# Altium PCB powerSupply2.PcbDoc
Units mm, origin at the board's own origin, x right, y up, seen from the top; angles counter-clockwise.
Board outline 50 x 50 mm, 4 copper layers (Top Layer, Layer 1, Layer 2, Bottom Layer), stack 1.586 mm thick; 33 components, 25 nets, 85 pads, 0 vias.
Unrouted connection lines stored in the file: 58.
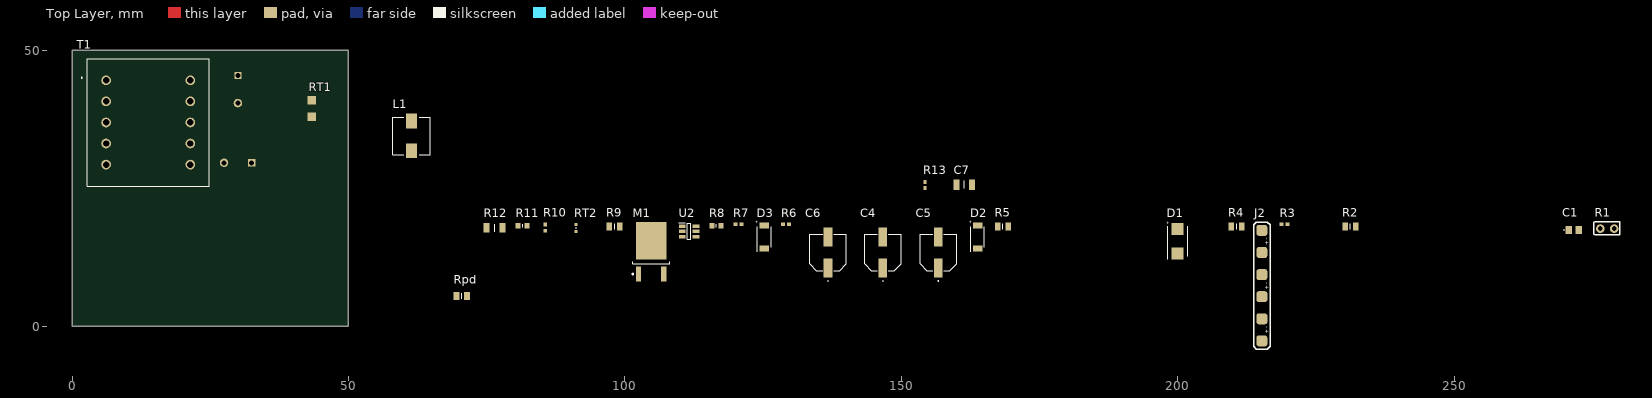
[diagram p0: Top Layer view]
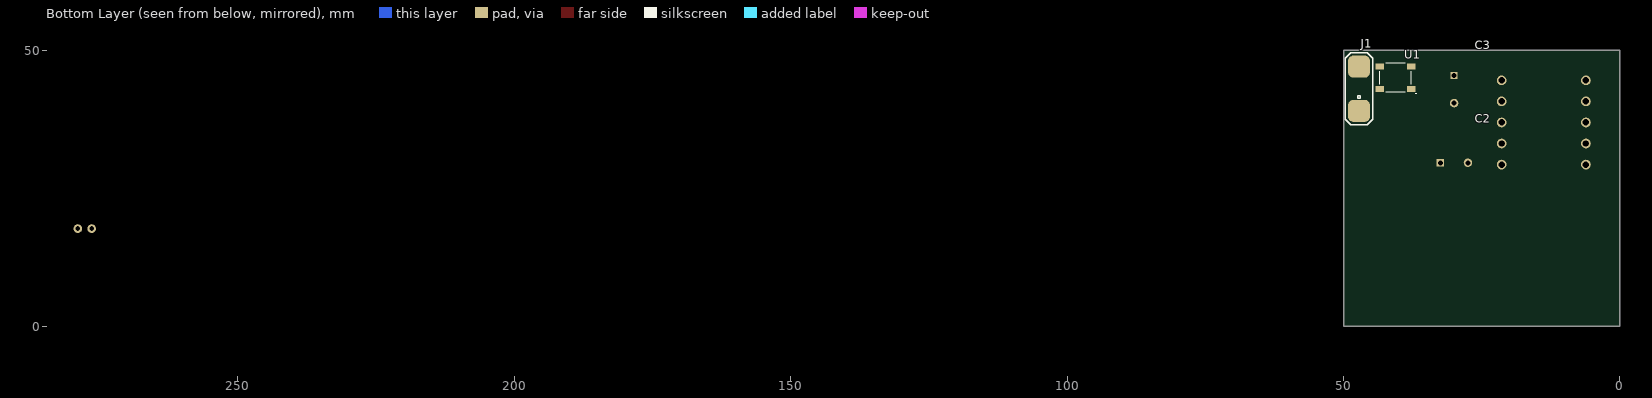
[diagram p1: Bottom Layer view, seen from below]

## Layer stack, top to bottom
Top Solder: solder mask 0.0203, Solder Resist, Dk 3.8
Top Layer: signal copper 0.035
Prepreg2: prepreg 0.2104, PP-006, Dk 4.6
Layer 1: signal copper 0.0152
Core: dielectric 1.065, FR-4, Dk 4.6
Layer 2: signal copper 0.0152
Prepreg1: prepreg 0.2104, PP-006, Dk 4.6
Bottom Layer: signal copper 0.035
Bottom Solder: solder mask 0.0203, Solder Resist, Dk 3.8

## Board outline
0,0 50,0 50,50 0,50

## Design rules (kind name [scope] priority, off if disabled: settings)
Clearance [All] p1: gap=0.3 ignorepadtopadclearanceinfootprint=FALSE
PolygonConnect [All] p1: connectstyle=Relief reliefconductorwidth=0.254 reliefentries=4 polygonreliefangle="90 Angle" airgapwidth=0.254
RoutingVias [All] p1: holewidth=0.3 width=0.6 viastyle="Through Hole" minholewidth=0.3 minwidth=0.6 maxholewidth=0.3 maxwidth=0.6
SilkToSolderMaskClearance [IsPad] p1: minsilkscreentomaskgap=0.1 clearancetoexposedcopper=TRUE
SolderMaskExpansion [All] p1: expansion=0.102 istentingtop=FALSE
Width [All] p1: maxlimit=1 minlimit=0.2 preferedwidth=0.5
29 further rules are at their usual default settings.

## Components (designator, comment, footprint, x,y, rotation, side; value= is the part's Value field where it differs from the comment)
C1 "0805C" 0805C 271.631,17.446 r0 top
C2 "10uF" 10uF 32.5,29.6 r180 bottom
C3 "10uF" 10uF 30,45.4 r270 bottom
C4 "16SVPG270MX" Cout 146.663,13.382 r0 top
C5 "16SVPG270MX" Cout 156.696,13.382 r0 top
C6 "16SVPG270MX" Cout 136.757,13.382 r0 top
C7 "1uF" 1206C 161.417,25.654 r0 top
D1 "UFS180Je3_TR13" UFS180Je3_TR13 200.003,15.414 r90 top
D2 "RB058LAM100TR" Shottky_Diode 163.808,16.176 r90 top
D3 "RB058LAM100TR" Shottky_Diode 125.2,16.176 r90 top
J1 "AC(IN)" AC(IN) 47.2,39 r90 bottom
J2 "12V" OUT(12V) 215.243,-2.62 r90 top
L1 "470uF" Inductor 61.4,31.8 r90 top
M1 "MOSFET" MOSFET 104.753,13.509 r90 top
R1 "3W-Resistor" 3W-Resistor 276.457,17.7 r0 top
R2 "4k99R" 0805R 231.245,18.081 r0 top
R3 "R" 0402R 218.799,18.462 r0 top
R4 "4k99R" 0805R 210.671,18.081 r0 top
R5 "4k99R" 0805R 168.38,18.081 r0 top
R6 "117R" 0402R 128.629,18.462 r0 top
R7 "22.1R" 0402R 119.993,18.462 r0 top
R8 "52k5R" 0603R 116.564,18.208 r0 top
R9 "10R" 0805R 98.149,18.081 r0 top
R10 "1k4R" 0402R 85.576,17.319 r90 top
R11 "19k3R" 0603R 81.512,18.208 r0 top
R12 "1.05R" 1206R 76.432,17.827 r0 top
R13 "6k19R" 0402R 154.305,25.019 r90 top
Rpd "10kR" 0805R 70.5,5.5 r0 top
RT1 "Cl-60" CL-60 43.4,37.9 r90 top
RT2 "NTCG104BF683JT1X" NTC 91.164,17.827 r90 top
T1 "750312495" 750312495 6.16,44.52 r0 top
U1 "CD-MBL206SL" CD-MBL210S_1 40.6,45 r270 bottom
U2 "UCC28701DBVT" SOT95P280X145-6N 111.611,17.192 r0 top

## Footprints (in the part's own frame and the unit in brackets; to place one, negate y for a bottom-side part, rotate by r counter-clockwise, add the part's x,y. Pads: shape width x height; smd on the part's side, far side on the other; paste and mask are expansions set on the pad)
3W-Resistor [mm]
  round 1.575 hole 0.85: 1(0,0) 2(2.5,0)
  silkscreen extent -1.14,-1.14 3.56,1.27, body extent -1.07,-1.15 2.79,1.15, height 8.18
10uF [mm]
  rect 1.3x1.3 hole 0.9: 1(0,0)
  round 1.524 hole 0.9: 2(5,0)
  body extent -4,-6.5 9,6.5, height 27
0402R [mm]
  rect 0.7x0.6 smd: 1(0,0) 2(1.1,0)
  body extent 0.05,-0.25 1.05,0.25, height 0.35
0603R [mm]
  rect 0.9x0.95 smd: 1(-0.8,0) 2(0.8,0)
  silkscreen extent 0,-0.3 0,0.3, body extent -0.8,-0.4 0.8,0.4, height 0.55
0805C [mm]
  rect 1.15x1.45 smd: 1(-0.9,0) 2(0.9,0)
  silkscreen extent -1.8,-0.05 -1.7,0.05, body extent -1.1,-0.76 1.1,0.69, height 0.89
0805R [mm]
  rect 1x1.4 smd: 1(-0.95,0) 2(0.95,0)
  silkscreen extent 0,-0.53 0,0.53, body extent -1,-0.63 1,0.63, height 0.5
1206C [mm]
  rect 1.1x1.92 smd: 1(-1.41,0) 2(1.41,0)
  silkscreen extent 0,-0.7 0,0.7, body extent -1.6,-0.8 1.6,0.8, height 2.29
1206R [mm]
  rect 1.05x1.75 smd: 1(-1.45,0) 2(1.45,0)
  silkscreen extent 0,-0.7 0,0.7, body extent -1.55,-0.8 1.55,0.8, height 0.75
750312495 [mm]
  round 1.755 hole 1.17: 1(0,0) 2(0,-3.81) 3(0,-7.62) 4(0,-11.43) 5(0,-15.24) 6(15.24,-15.24) 7(15.24,-11.43) 8(15.24,-7.62) 9(15.24,-3.81) 10(15.24,0)
  silkscreen extent -4.48,-19.12 18.62,3.88, body extent -3.38,-19.12 18.62,3.88, height 17.63
AC(IN) [mm]
  rrect50% 4x4 smd: 1(0,0) 2(8,0)
  silkscreen extent -2.5,-2.5 10.5,2.5
CD-MBL210S_1 [mm]
  rect 1.1x1.5 smd: 1(2.05,2.86) 2(2.05,-2.86) 3(-2.05,-2.86) 4(-2.05,2.86)
  silkscreen extent -2.6,-2.85 2.91,3.78, body extent -2.59,-2.92 2.71,2.92, height 1.23
CL-60 [mil]
  rect 60x60 smd: 1(0,0) 2(118.11,0)
Cout [mm]
  rect 1.6x3.5 smd: 1(0,-2.8) 2(0,2.8)
  silkscreen extent -3.3,-5.2 3.3,3.3, body extent -3.3,-3.65 3.3,3.65, height 7.91
Inductor [mm] "Precision Wire Wound Inductor, 2-Leads, Body 6.50x6.50mm, IPC Medium Density"
  rect 2.65x1.95 smd: 1(0,0) 2(5.35,0)
  silkscreen extent -0.72,-3.4 6.07,3.4, body extent -0.67,-3.25 6.03,3.25, height 5
MOSFET [mm] "D-PAK, 3-Pads, Body 6.21x6.73mm (max), IPC High Density"
  rect 2.75x0.95 smd: 1(-4.05,2.29) 3(-4.05,-2.29)
  rect 6.8x5.55 smd: 4(2,0)
  silkscreen extent -4.17,-3.35 -1.8,3.44, body extent -4.52,-3.37 5.42,3.37, height 2.56
NTC [mm]
  rect 0.55x0.6 smd: 1(-0.65,0) 2(0.65,0)
  silkscreen extent 0,-0.15 0,0.15, body extent -0.5,-0.25 0.5,0.25, height 0.55
OUT(12V) [mm]
  rrect50% 2x2 smd: 1(0,0) 2(4,0) 3(8,0) 4(12,0) 5(16,0) 6(20,0)
  silkscreen extent -1.5,-1.5 21.5,1.5
Shottky_Diode [mm]
  rect 1.12x1.72 smd: 1(-2.075,0) 2(2.075,0)
  silkscreen extent -2.64,-1.25 1.85,1.25, body extent -2.35,-1.25 2.35,1.25, height 1.05
SOT95P280X145-6N [mm]
  rect 1.2x0.6 smd: 1(-1.25,0.95) 2(-1.25,0) 3(-1.25,-0.95) 4(1.25,-0.95) 5(1.25,0) 6(1.25,0.95)
  silkscreen extent -1.85,-1.45 0.3,1.6, body extent -1.4,-1.45 1.4,1.45, height 1.2
UFS180Je3_TR13 [mm]
  rect 2.2x2.15 smd: 1(-2.2,0) 2(2.2,0)
  silkscreen extent -3.27,-1.81 2.7,1.81, body extent -2.7,-1.81 2.7,1.81, height 3.3

## Part data
C2 C3: library part 10uF(Cin), "Alum. Electrolytic Cap 10µF 400V 10mm Radial WCAP-AT1H; Lifetime 10000h +105°C", Case/Package=Radial, Manufacturer="Wurth Electronics", Manufacturer Part Number=860241375002, Max Operating Temperature=105°C, Min Operating Temperature=-25°C, Package Quantity=500, Ripple Current=274mA, Tolerance=20%, Voltage Rating=400V, Capacitance=10uF, Category="Aluminum Electrolytic Capacitors", ComponentLink1Description=http://www.farnell.com/datasheets/1958429.pdf?src-supplier=Farnell, ComponentLink1URL=http://www.farnell.com/datasheets/1958429.pdf?src-supplier=Farnell, ComponentLink2Description=http://katalog.we-online.de/pbs/datasheet/860241375002.pdf?src-supplier=Digi-Key, ComponentLink2URL=http://katalog.we-online.de/pbs/datasheet/860241375002.pdf?src-supplier=Digi-Key, ComponentLink3Description=http://www.farnell.com/datasheets/1958429.pdf?src-supplier=Element14, ComponentLink3URL=http://www.farnell.com/datasheets/1958429.pdf?src-supplier=Element14, Diameter=10mm, Height=16mm, Height - Seated (Max)=0.688inch, Lead Pitch=0.197inch, Life (Hours)=10000Hour, Mount="Through Hole", Packaging="Tape and Reel", Polarity=Polar, Pricing 1="1=0.88000, 10=0.87700, 50=0.74800, 100=0.65100, 1000=0.57900, 10000=0.57900 (USD)", REACH SVHC=Unknown, RoHS=Yes, RoHS Compliant=Yes, Stock 1=2312, Supplier 1=Mouser, Voltage Rating (DC)=400V
C4 C5 C6: library part Cout, "Capacitor Polarised", Manufacturer_Name=Panasonic, Mouser Part Number=667-16SVPG270MX, Arrow Part Number=16SVPG270MX, Arrow Price/Stock=https://www.arrow.com/en/products/16svpg270mx/panasonic?region=nac, Datasheet Link=http://industrial.panasonic.com/cdbs/www-data/pdf/AAB8000/AAB8000C175.pdf, Height=8mm, Manufacturer_Part_Number=16SVPG270MX, Mouser Price/Stock=https://www.mouser.co.uk/ProductDetail/Panasonic/16SVPG270MX?qs=XFmntM7Yc9fZM%2FbqBr2Fvw%3D%3D
C7: library part 1206C, "Cap Ceramic 1uF 100V X7R 10% SMD 1206 125°C Embossed T/R", Case/Package=1206, Dielectric=X7R, Manufacturer="Kyocera AVX", Manufacturer Part Number=12061C105KAT4A, Tolerance=10%, Voltage Rating (DC)=100V, Capacitance=1uF, Category="Ceramic Capacitors", ComponentLink1Description=http://datasheets.avx.com/X7RDielectric.pdf?src-supplier=Digi-Key, ComponentLink1URL=http://datasheets.avx.com/X7RDielectric.pdf?src-supplier=Digi-Key, Pricing 1="1=0.49000, 10=0.23600, 50=0.23600, 100=0.20300, 1000=0.12800, 10000=0.10400 (USD)", RoHS=Yes, RoHS Compliant=Yes, Stock 1=79379, Supplier 1=Mouser
D1: "Diode", Arrow Part Number=UFS180JE3/TR13, Manufacturer_Name="Microsemi Corporation", Manufacturer_Part_Number=UFS180Je3/TR13, Mouser Part Number=494-UFS180JE3/TR13, Arrow Price/Stock=https://www.arrow.com/en/products/ufs180je3tr13/microsemi, Datasheet Link=https://media.digikey.com/pdf/Data%20Sheets/Microsemi%20PDFs/UFS160J-UFS180J.pdf, Height=3.3mm, Mouser Price/Stock=https://www.mouser.co.uk/ProductDetail/Microchip-Microsemi/UFS180Je3-TR13?qs=pU29NIZ4ZwBQwIY5BrOkmA%3D%3D
D2 D3: library part Shottky_Diode, "Schottky Diode", Manufacturer_Name="ROHM Semiconductor", Mouser Part Number=755-RB058LAM100TR, Datasheet Link=https://fscdn.rohm.com/en/products/databook/datasheet/discrete/diode/schottky_barrier/rb058lam100tr-e.pdf, Height=1.05mm, Manufacturer_Part_Number=RB058LAM100TR, Mouser Price/Stock=https://www.mouser.co.uk/ProductDetail/ROHM-Semiconductor/RB058LAM100TR?qs=HXFqYaX1Q2xzCgpEm4IcAg%3D%3D
J2: library part Out(12V)
L1: library part 470uH(L1), "Inductor Power Shielded Wirewound 470uH 10% 1KHz 18Q-Factor Ferrite 0.18A 3.3Ohm DCR T/R", Case/Package=Nonstandard, Current=2.2A, Current Rating=180mA, DC Resistance (DCR)=3.3R, Inductance=470uH, Manufacturer=Bourns, Manufacturer Part Number=SRR0604-471KL, Max Operating Temperature=125°C, Min Operating Temperature=-40°C, Package Quantity=1000, Resistor Type=Wirewound, Saturation Current=220mA, Self Resonant Frequency=6.5MHz, Test Frequency=1kHz, Tolerance=10%, Category="Fixed Inductors", ComponentLink1Description=https://datasheet.ciiva.com/29348/447222-da-01-en-induktivitaet-srr0604-471kl-470uh-0-22a-29348188.pdf?src-supplier=Conrad, ComponentLink1URL=https://datasheet.ciiva.com/29348/447222-da-01-en-induktivitaet-srr0604-471kl-470uh-0-22a-29348188.pdf?src-supplier=Conrad, ComponentLink2Description=https://datasheet.ciiva.com/6691/srr0604-6691703.pdf?src-supplier=Digi-Key, ComponentLink2URL=https://datasheet.ciiva.com/6691/srr0604-6691703.pdf?src-supplier=Digi-Key, ComponentLink3Description=https://datasheet.ciiva.com/6691/srr0604-6691705.pdf?src-supplier=Digi-Key, ComponentLink3URL=https://datasheet.ciiva.com/6691/srr0604-6691705.pdf?src-supplier=Digi-Key, ComponentLink4Description=https://datasheet.ciiva.com/6691/srr0604-6691708.pdf?src-supplier=Digi-Key, ComponentLink4URL=https://datasheet.ciiva.com/6691/srr0604-6691708.pdf?src-supplier=Digi-Key, ComponentLink5Description=https://datasheet.ciiva.com/8517/srr0604-8517198.pdf?src-supplier=Avnet, ComponentLink5URL=https://datasheet.ciiva.com/8517/srr0604-8517198.pdf?src-supplier=Avnet, ComponentLink6Description=https://datasheet.ciiva.com/31843/srr0604-31843470.pdf?src-supplier=Onlinecomponents.com, ComponentLink6URL=https://datasheet.ciiva.com/31843/srr0604-31843470.pdf?src-supplier=Onlinecomponents.com, Core Material=Ferrite, DC Current=180mA, Depth=6.7mm, Height=4.8mm, Height - Seated (Max)=0.189inch, Length=6.5mm, Max DC Current=180mA, Military Standard=Not, Mount="Surface Mount", Packaging="Tape and Reel", Pricing 1="1=0.93000, 10=0.67800, 50=0.67800, 100=0.62800, 1000=0.41200, 10000=0.38700 (USD)", Q Factor=18, Radiation Hardening=No, RoHS=Yes, Shielding=Shielded, Stock 1=1611, Supplier 1=Mouser, Termination=SMD/SMT, Width=6.5mm
M1: "Single N-Channel 800 V 900 mOhm 15 nC CoolMOS Power Mosfet - DPAK", Capacitance=15pF, Case/Package=TO-252-3, Continuous Drain Current (ID)=6A, Drain to Source Voltage (Vdss)=800V, Frequency=16MHz, Frequency Stability=0.15%, Frequency Tolerance=0.5%, Input Capacitance=350pF, Manufacturer=Infineon, Manufacturer Part Number=IPD80R900P7ATMA1, Max Operating Temperature=150°C, Max Power Dissipation=45W, Min Operating Temperature=-55°C, Resistor Type=Ceramic, Category=MOSFETs, ComponentLink1Description=https://www.infineon.com/dgdl/Infineon-IPD80R900P7-DS-v02_00-EN.pdf?fileId=5546d4625b3ca4ec015b4287da753ee9&src-supplier=Digi-Key, ComponentLink1URL=https://www.infineon.com/dgdl/Infineon-IPD80R900P7-DS-v02_00-EN.pdf?fileId=5546d4625b3ca4ec015b4287da753ee9&src-supplier=Digi-Key, Halogen Free="Halogen Free", Impedance=40R, Lead Free="Contains Lead", Max Dual Supply Voltage=800V, Mount="Surface Mount", Packaging="Cut Tape", Pricing 1="1=1.85000, 10=1.67000, 50=1.67000, 100=1.30000, 1000=0.94000, 10000=0.93900 (USD)", Rds On Max=900mR, RoHS=Yes, RoHS Compliant=Yes, Stock 1=130, Supplier 1=Mouser
R1: "Resistor", Arrow Part Number=PR03000206202JAC00, Manufacturer_Name=Vishay, Mouser Part Number=594-5093NW62K00J, Arrow Price/Stock=https://www.arrow.com/en/products/pr03000206202jac00/vishay, Datasheet Link=https://www.vishay.com/docs/28729/pr010203.pdf, Manufacturer_Part_Number=PR03000206202JAC00, Mouser Price/Stock=https://www.mouser.co.uk/ProductDetail/Vishay-BC-Components/PR03000206202JAC00?qs=LCMWAU1DZcxovZq7UzVsNA%3D%3D
R2 R4 R5 R9 Rpd: library part 0805R
R3 R6 R7 R10 R13: library part 0402R
R8 R11: library part 0603R
R12: library part 1206R
RT1: "CL Series 10 Ohm ± 25 % 5 A Radial Uninsulated Leads Thermistor Disc", Manufacturer=Amphenol, Manufacturer Part Number=CL-60, Category=Uncategorized, ComponentLink1Description=https://datasheet.ciiva.com/29855/aas-920-325d-thermometrics-ntc-inrush-031814-web-29855691.pdf?src-supplier=Digi-Key, ComponentLink1URL=https://datasheet.ciiva.com/29855/aas-920-325d-thermometrics-ntc-inrush-031814-web-29855691.pdf?src-supplier=Digi-Key, ComponentLink2Description=https://datasheet.ciiva.com/31455/629282-31455967.pdf?src-supplier=Element14, ComponentLink2URL=https://datasheet.ciiva.com/31455/629282-31455967.pdf?src-supplier=Element14, ComponentLink3Description=https://datasheet.ciiva.com/46652/70181314-46652413.pdf?src-supplier=Allied+Electronics, ComponentLink3URL=https://datasheet.ciiva.com/46652/70181314-46652413.pdf?src-supplier=Allied+Electronics, Pricing 1="1=2.16000, 10=1.95000, 50=1.95000, 100=1.33000, 1000=0.97800, 10000=0.85800 (USD)", RoHS=No, Stock 1=5231, Supplier 1=Mouser
RT2: library part NTC, "Thermistor", Manufacturer_Name=TDK, Mouser Part Number=810-NTCG104BF683JT, Datasheet Link=https://product.tdk.com/system/files/dam/doc/product/sensor/ntc/chip-ntc-thermistor/catalog/tpd_commercial_ntc-thermistor_ntcg_en.pdf, Height=0.55mm, Manufacturer_Part_Number=NTCG104BF683JT1X, Mouser Price/Stock=https://www.mouser.com/Search/Refine.aspx?Keyword=810-NTCG104BF683JT
T1: library part Transformer, "Transformer", Manufacturer_Name="Wurth Elektronik", Mouser Part Number=710-750312495, Datasheet Link=https://www.we-online.com/catalog/datasheet/750312495.pdf, Height=17.53mm, Manufacturer_Part_Number=750312495, Mouser Price/Stock=https://www.mouser.co.uk/ProductDetail/Wurth-Elektronik/750312495?qs=qSfuJ%252Bfl%2Fd7M%2FwhZasVw9g%3D%3D
U1: library part Bridge_Rectifier, "DIO BR VRRM 600V 2A MBLS / Tape & Reel - 13\" reel RoHS Compliant: Yes", Average Rectified Current=2A, Manufacturer=Bourns, Max Operating Temperature=175°C, Min Operating Temperature=-55°C, ComponentLink1Description=http://www.farnell.com/datasheets/2176055.pdf?src-supplier=Farnell, ComponentLink1URL=http://www.farnell.com/datasheets/2176055.pdf?src-supplier=Farnell, ComponentLink2Description=http://www.farnell.com/datasheets/2176055.pdf?src-supplier=Element14, ComponentLink2URL=http://www.farnell.com/datasheets/2176055.pdf?src-supplier=Element14, ComponentLink3Description=https://www.bourns.com/docs/Product-Datasheets/cd-mbl2xxsl.pdf?src-supplier=Digi-Key, ComponentLink3URL=https://www.bourns.com/docs/Product-Datasheets/cd-mbl2xxsl.pdf?src-supplier=Digi-Key, Manufacturer Part Number=CD-MBL206SL, Mount="Surface Mount", Packaging="Cut Tape", Pricing 1="1=0.45000, 10=0.39200, 50=0.39200, 100=0.29300, 1000=0.17800, 10000=0.13700 (USD)", RoHS=Yes, RoHS Compliant=Yes, Stock 1=14176, Supplier 1=Mouser
U2: library part Flyback_Controller, "Integrated Circuit", Manufacturer_Name="Texas Instruments", Mouser Part Number=595-UCC28701DBVT, Arrow Part Number=UCC28701DBVT, Arrow Price/Stock=https://www.arrow.com/en/products/ucc28701dbvt/texas-instruments, Datasheet Link=http://www.ti.com/lit/gpn/ucc28701, Height=1.45mm, Manufacturer_Part_Number=UCC28701DBVT, Mouser Price/Stock=https://www.mouser.co.uk/ProductDetail/Texas-Instruments/UCC28701DBVT?qs=rg6Iqu58vpU9cO7MIDHsMA%3D%3D

## Nets (pads, with @x,y where several pads share a name; then routed paths per layer and width w, separated by ;. In a path a pad name is that pad's centre, name@x,y a point inside that pad or via, vN(x,y) a via of type N, cw(c..) or ccw(c..) an arc to the next point about the centre after c; other vN are vias at no path point)
+12: C4.1 C5.1 C6.1 D2.1 J2.1 J2.3 J2.5 R6.2
AC_L: J1.1 RT1.1
AC_L2: RT1.2 U1.2
AC_N: J1.2 U1.3
AUX_D_OUT: D3.1 R7.2
AUX_V+: D3.2 R8.2 T1.8
HV_DC+: C2.1 L1.1 U1.1
HV_GND: C2.2 C3.2 C7.1 R11.1 R12.1 R13.1 Rpd.1 T1.3 U1.4 U2.5
HV_V+: C1.2 C3.1 L1.2 R1.2 R2.2 T1.1
LV_GND: C4.2 C5.2 C6.2 J2.2 J2.4 J2.6 R6.1 T1.5
MOS_CS: R10.2 U2.4
MOS_Drain: D1.2 M1.4 T1.9
MOS_DRV: R9.1 U2.3
MOS_Gate: M1.1 R9.2 Rpd.2
MOS_Source: M1.3 R10.1 R12.2
NTC_IN: RT2.1 U2.1
NTC_OUT: R13.2 RT2.2
PRI_Short: T1.2 T1.10
RSTR1: R2.1 R4.2
RSTR2: R4.1 R5.2
SEC_V+: D2.2 T1.6
SNUB_CAP_OUT: C1.1 R1.1 R3.2
SNUB_DIODE_OUT: D1.1 R3.1
VDD_IN: C7.2 R5.1 R7.1 U2.2
VS_IN: R8.1 R11.2 U2.6
pads on no net: T1.4 T1.7

## Text inside footprints (layer, text, board x,y; h text height)
D1: Top Overlay "+" at 198.462,18.422 h0.5 r90
D2: Top Overlay "+" at 162.775,18.549 h0.5 r90
D3: Top Overlay "+" at 124.167,18.549 h0.5 r90
J2: Top Overlay "+" at 216.51,-1.353 h0.7 r90; Top Overlay "+" at 216.51,6.647 h0.7 r90; Top Overlay "+" at 216.51,14.647 h0.7 r90; Top Overlay "-" at 216.493,-0.353 h0.7 r90; Top Overlay "-" at 216.493,7.647 h0.7 r90; Top Overlay "-" at 216.493,15.647 h0.7 r90